# EAGLE board Schematic Sebix (EAGLE 9.6.2)
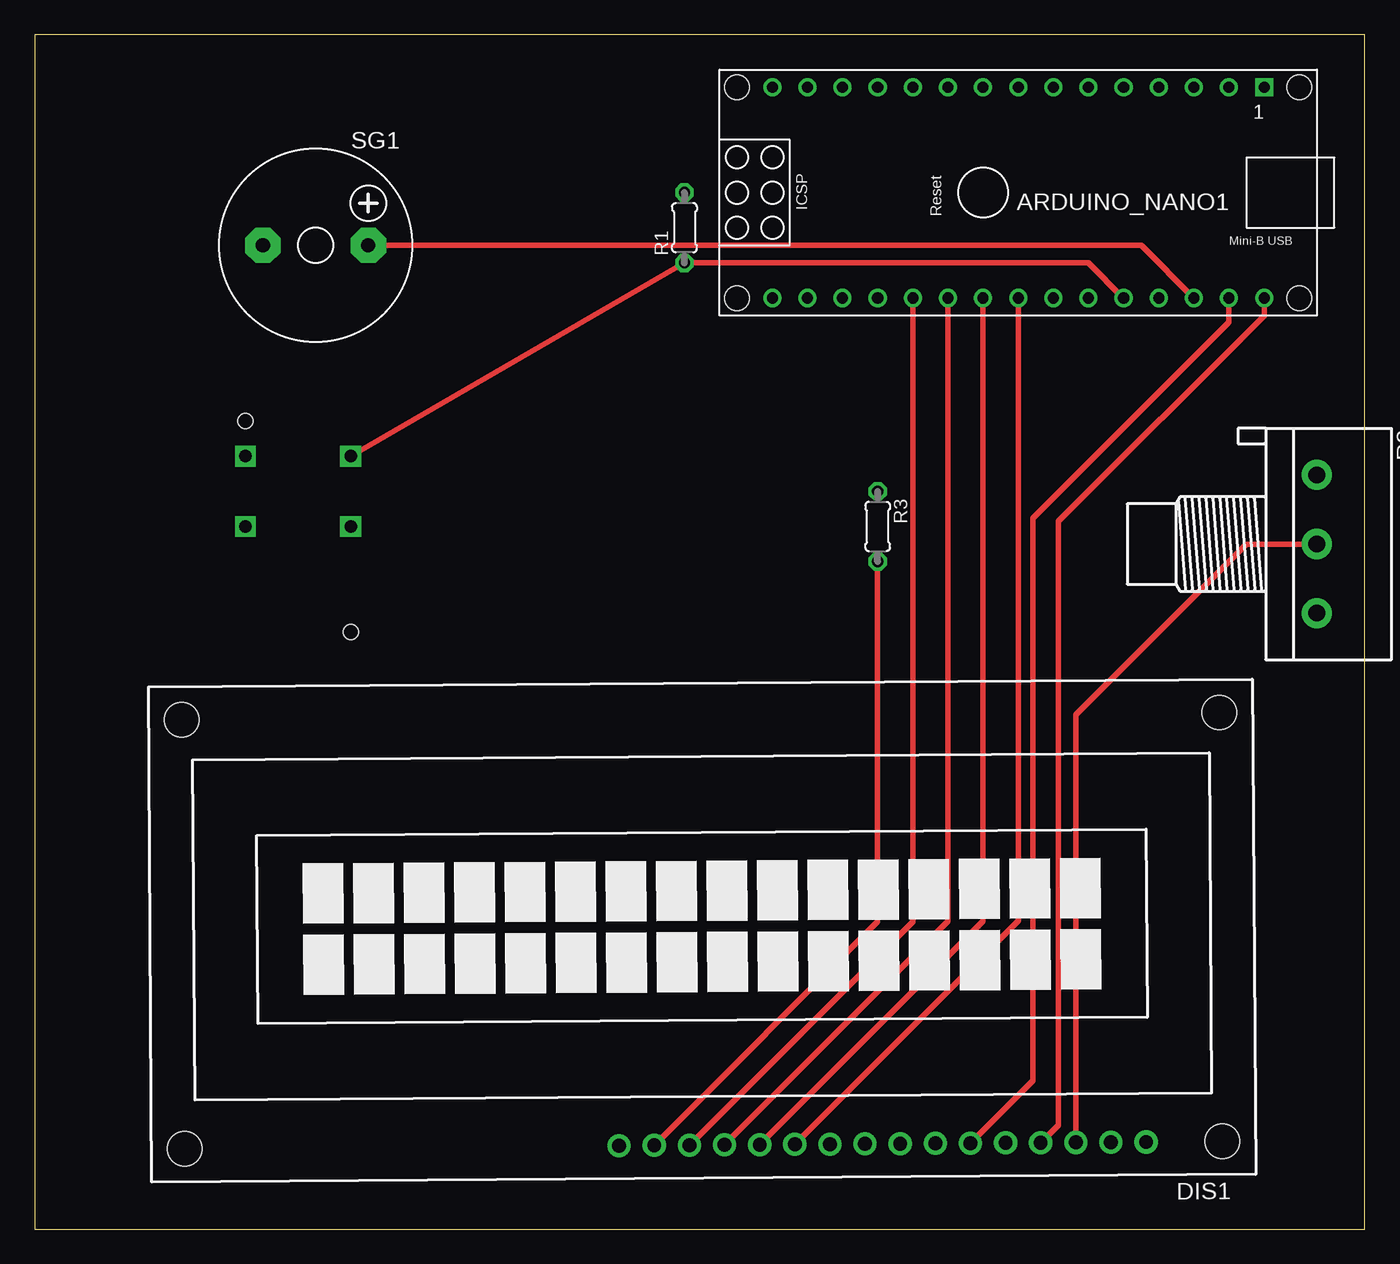
[diagram p0: board, top side]
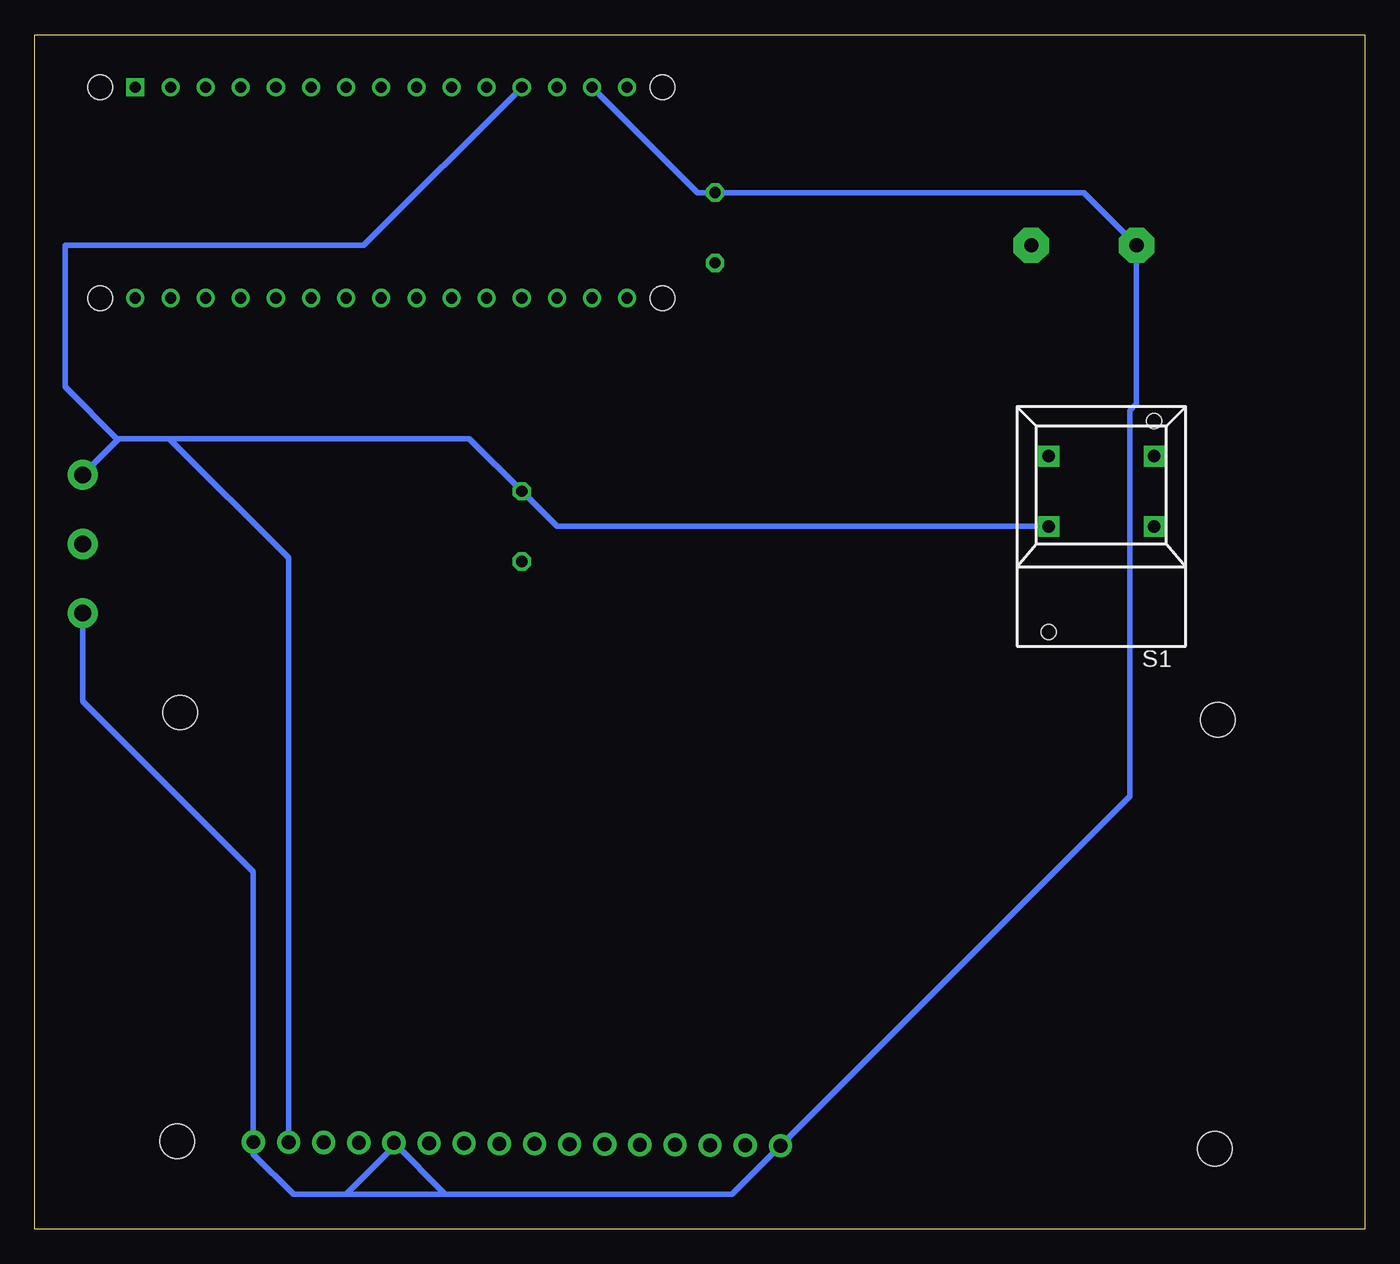
[diagram p1: board, bottom side, seen from below]

Size 96.19 x 86.35 mm. Coordinates in mm from the lower left corner, seen from the top.
Outline: 0,0 96.19,0 96.19,86.35 0,86.35 0,0
Copper layers (1*16): Top 0.035mm / dielectric 1.5mm / Bottom 0.035mm
Design rules "default": minimum track width 6mil, minimum drill 0.35mm, track to track 6mil, track to pad 6mil, pad to pad 6mil, via to via 6mil, smd to smd 6mil, copper to edge 40mil, drill to drill 6mil, minimum pad ring 10mil, minimum via ring 8mil, stop-mask expansion 4mil, vias tented up to drill 0mil, thermal gap 10mil

## Footprints (pad centres in the part's own frame; a part is rotated, then mirrored left to right if it is on the bottom)
ARDUINO_NANO = drill 0.8 square: 1 -20.32,-7.62 | drill 0.8: 2 -17.78,-7.62; 3 -15.24,-7.62; 4 -12.7,-7.62; 5 -10.16,-7.62; 6 -7.62,-7.62; 7 -5.08,-7.62; 8 -2.54,-7.62; 9 0,-7.62; 10 2.54,-7.62; 11 5.08,-7.62; 12 7.62,-7.62; 13 10.16,-7.62; 14 12.7,-7.62; 15 15.24,-7.62; 16 15.24,7.62; 17 12.7,7.62; 18 10.16,7.62; 19 7.62,7.62; 20 5.08,7.62; 21 2.54,7.62; 22 0,7.62; 23 -2.54,7.62; 24 -5.08,7.62; 25 -7.62,7.62; 26 -10.16,7.62; 27 -12.7,7.62; 28 -15.24,7.62; 29 -17.78,7.62; 30 -20.32,7.62 | hole 1.778: -22.86,-7.62; -22.86,7.62; 17.78,7.62; 17.78,-7.62
TUXGR_16X2_R2 = drill 1 pad 1.676: 1 -32,15.5; 2 -29.46,15.5; 3 -26.92,15.5; 4 -24.38,15.5; 5 -21.84,15.5; 6 -19.3,15.5; 7 -16.76,15.5; 8 -14.22,15.5; 9 -11.68,15.5; 10 -9.14,15.5; 11 -6.6,15.5; 12 -4.06,15.5; 13 -1.52,15.5; 14 1.02,15.5; 15 3.56,15.5; 16 6.1,15.5 | hole 2.5: -37.5,-15.5; 37.5,-15.5; -37.5,15.5; 37.5,15.5
0204/5 = drill 0.813 octagon: 1 -2.54,0; 2 2.54,0
3RP/1610N = drill 1.2 pad 2.184: 1 -5,0; 2 0,0; 3 5,0
5501 = drill 0.9 pad 1.5 square: 1A 0,3.81; 1B 0,-3.81; NC 5.08,-3.81; NO 5.08,3.81 | hole 1.1: -7.62,3.81; 7.62,-3.81
F/CM12P = drill 1.016 pad 2.54 octagon: + 3.81,0; - -3.81,0

## Placement (x,y rotation side)
ARDUINO_NANO1  [ARDUINO_NANO]  68.58,74.93 180 top
DIS1  TUXGR_16X2_R2  [TUXGR_16X2_R2]  48.26,21.59 180.4 top
R1  [0204/5]  46.99,72.39 90 top
R2  [3RP/1610N]  92.71,49.53 270 top
R3  [0204/5]  60.96,50.8 270 top
S1  5501  [5501]  19.05,50.8 90 bottom
SG1  F/CM12P  [F/CM12P]  20.32,71.12 0 top

## Library data of the parts
ARDUINO_NANO1 = ArduinoNanoV30
DIS1 = display-lcd; OC_FARNELL: unknown; OC_NEWARK: unknown
R1 R3 = rcl; SPICEPREFIX: R
R2 = pot
S1 = switch
SG1 = buzzer; OC_FARNELL: unknown; OC_NEWARK: unknown

## Nets
GND: ARDUINO_NANO1.19
N$1: ARDUINO_NANO1.28 SG1.+
N$4: ARDUINO_NANO1.30 DIS1.4
N$6: ARDUINO_NANO1.29 DIS1.6
N$7: ARDUINO_NANO1.23 DIS1.11
N$8: ARDUINO_NANO1.22 DIS1.12
N$9: ARDUINO_NANO1.21 DIS1.13
N$10: ARDUINO_NANO1.20 DIS1.14
N$CN: DIS1.3 R2.2
N$GND: ARDUINO_NANO1.14 DIS1.1 DIS1.5 DIS1.16 R1.2 R2.3 SG1.-
N$PB: ARDUINO_NANO1.26 R1.1 S1.NO
N$R3: DIS1.15 R3.2
N$VCC: ARDUINO_NANO1.12 DIS1.2 R2.1 R3.1 S1.1A
VIN: ARDUINO_NANO1.15

## Tracks (layer width: path | path; a pad name or v marks a point on that pad's centre or on a via)
N$1
  Top 0.406: ARDUINO_NANO1.28 80.01,71.12 SG1.+
N$4
  Top 0.406: ARDUINO_NANO1.30 88.9,66.04 74.02,51.16 74.02,7.53 DIS1.4
N$6
  Top 0.406: ARDUINO_NANO1.29 86.36,65.56 72.19,51.39 72.19,10.75 DIS1.6
N$7
  Top 0.406: ARDUINO_NANO1.23 71.12,22.29 DIS1.11
N$8
  Top 0.406: ARDUINO_NANO1.22 68.58,22.27 DIS1.12
N$9
  Top 0.406: ARDUINO_NANO1.21 66.04,22.25 DIS1.13
N$10
  Top 0.406: ARDUINO_NANO1.20 63.5,22.23 DIS1.14
N$CN
  Top 0.406: R2.2 87.63,49.53 75.29,37.19 DIS1.3
N$GND
  Bottom 0.406: R2.3 92.71,38.18 80.37,25.84 DIS1.1 80.37,5.44 77.47,2.54 73.66,2.54 | ARDUINO_NANO1.14 48.26,74.93 R1.2 20.32,74.93 SG1.- 16.51,59.65 17.01,59.15 17.01,31.31 DIS1.16 45.78,2.54 66.51,2.54 | 73.66,2.54 66.51,2.54 | 73.66,2.54 70.21,5.99 DIS1.5 66.51,2.54
N$PB
  Top 0.406: S1.NO R1.1 76.2,69.85 ARDUINO_NANO1.26
N$R3
  Top 0.406: R3.2 60.96,22.22 DIS1.15
N$VCC
  Bottom 0.406: 86.44,57.15 64.77,57.15 R3.1 58.42,50.8 S1.1A | 86.44,57.15 90.09,57.15 R2.1 90.17,57.07 93.98,60.88 93.98,71.12 72.39,71.12 ARDUINO_NANO1.12 | DIS1.2 77.83,48.54 86.44,57.15